# Altium PCB PCB1.PcbDoc
Units mm, origin at the board's own origin, x right, y up, seen from the top; angles counter-clockwise.
Board outline 42.53 x 54.6 mm, 2 copper layers (L1, L2), stack 1.671 mm thick; 41 components, 30 nets, 173 pads, 27 vias.
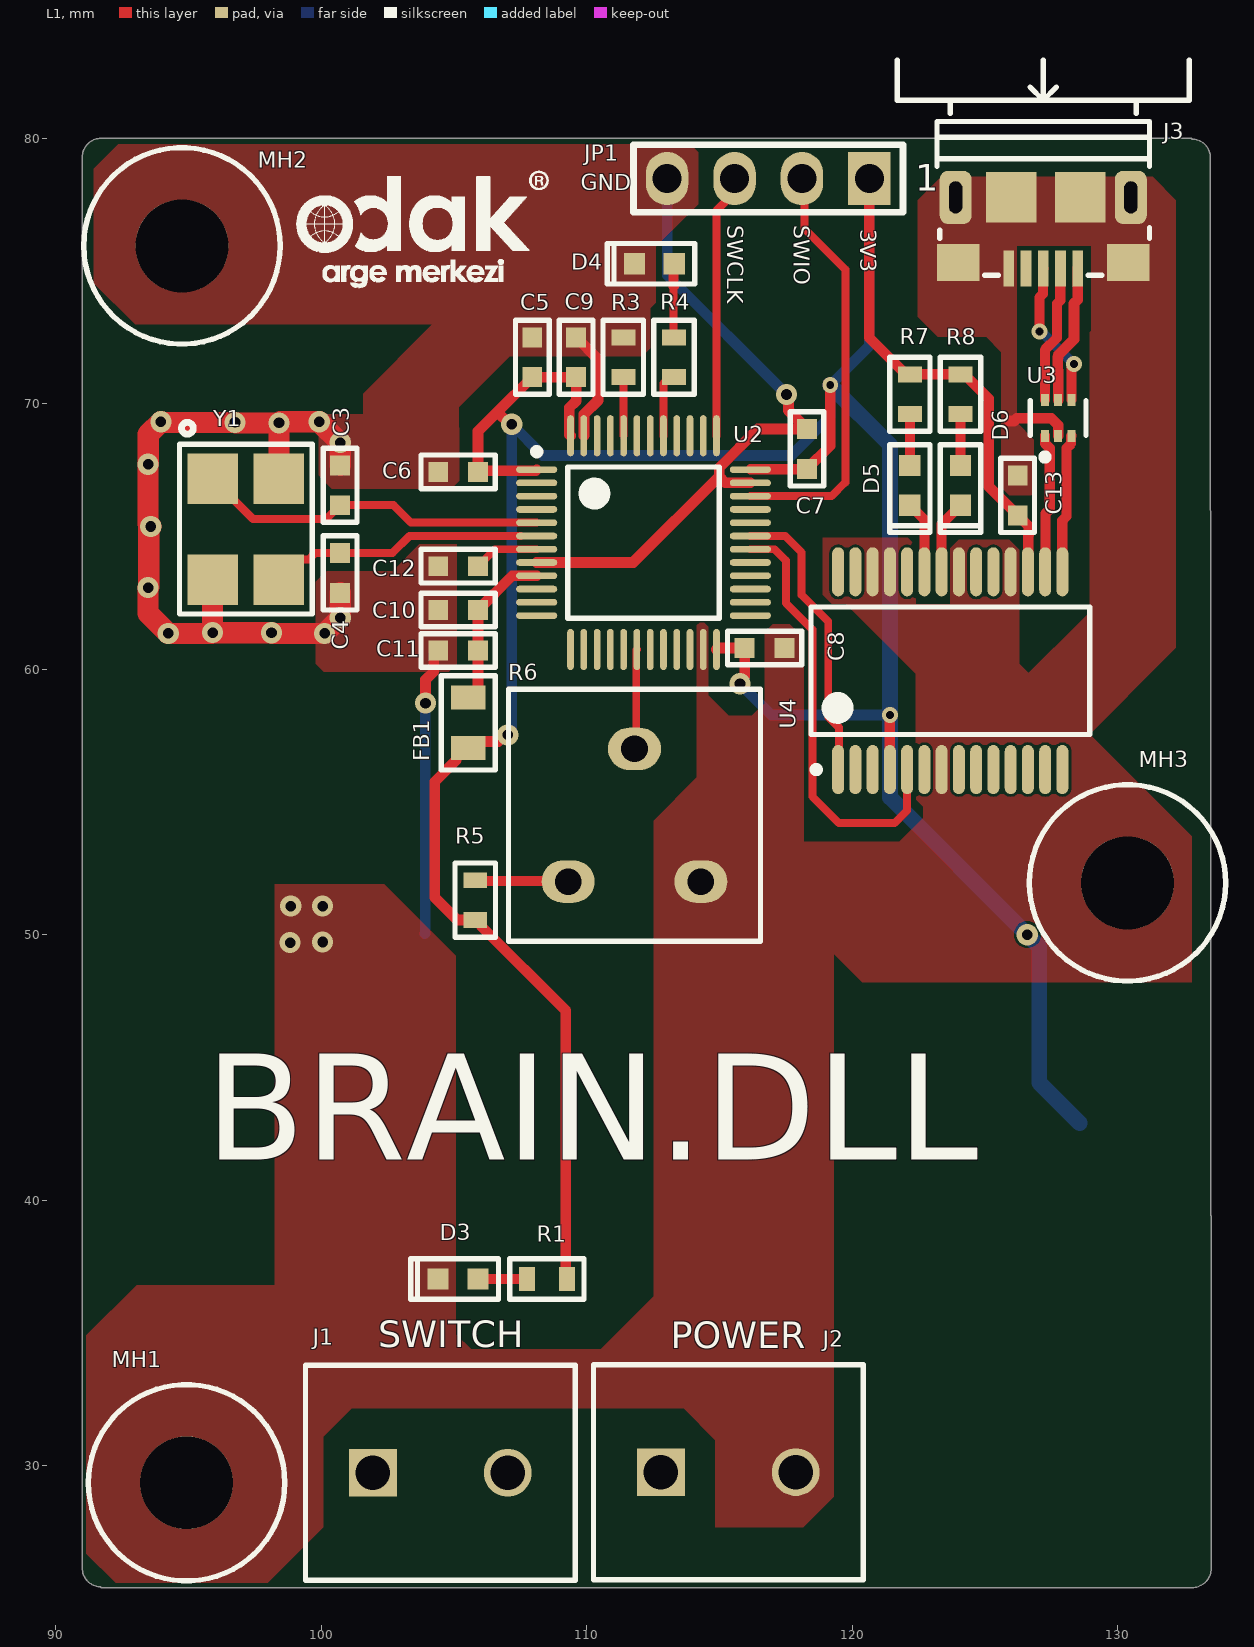
[diagram p0: L1 view]
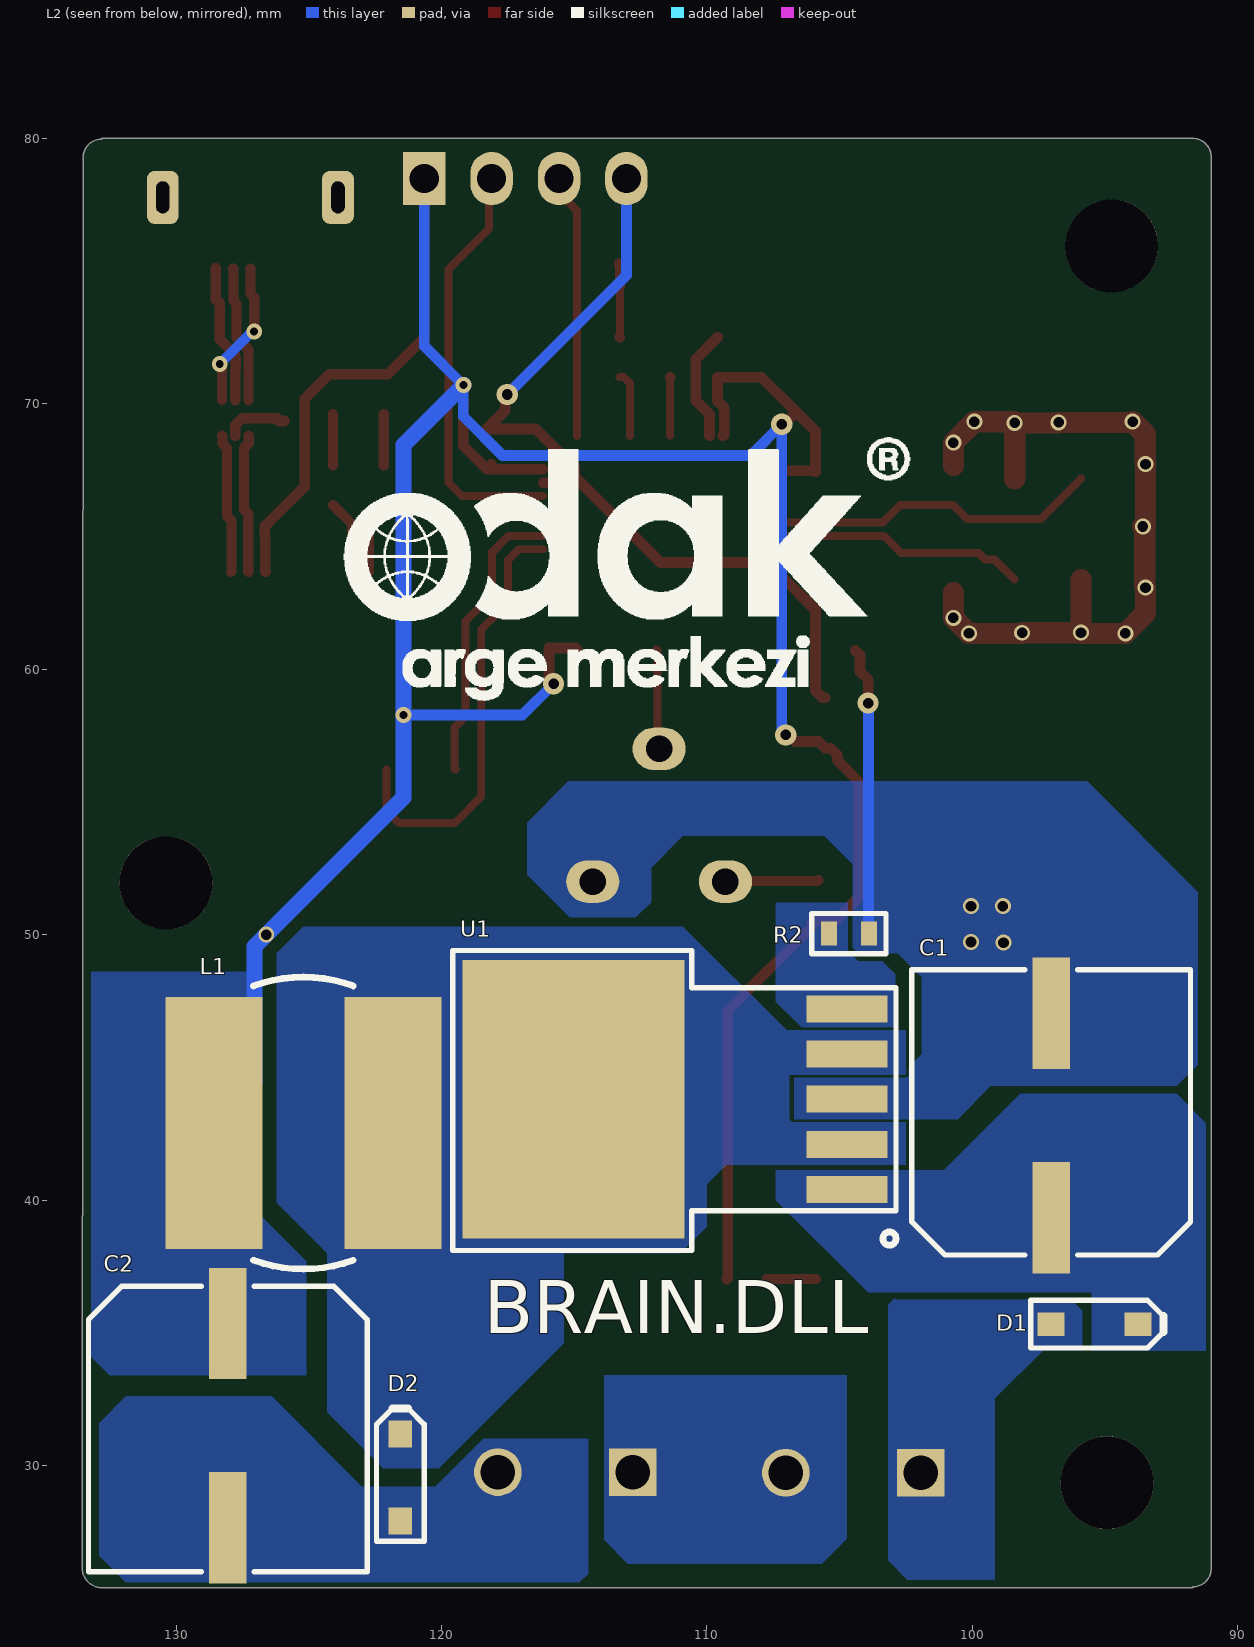
[diagram p1: L2 view, seen from below]
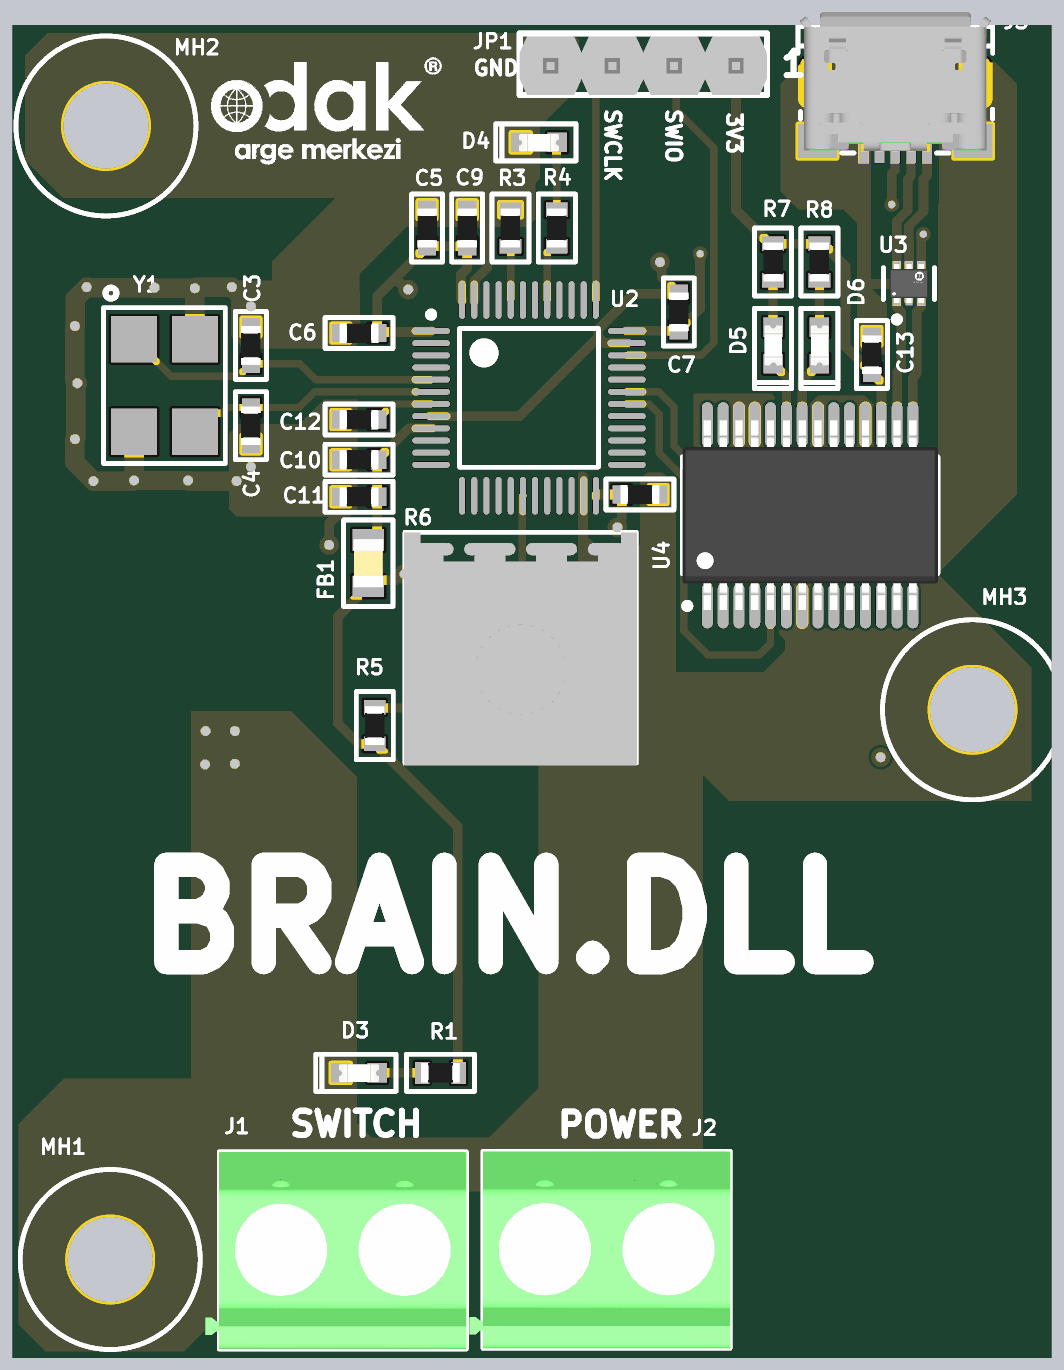
[diagram p2: 3D render of the assembled board from above, using the file's embedded part models]
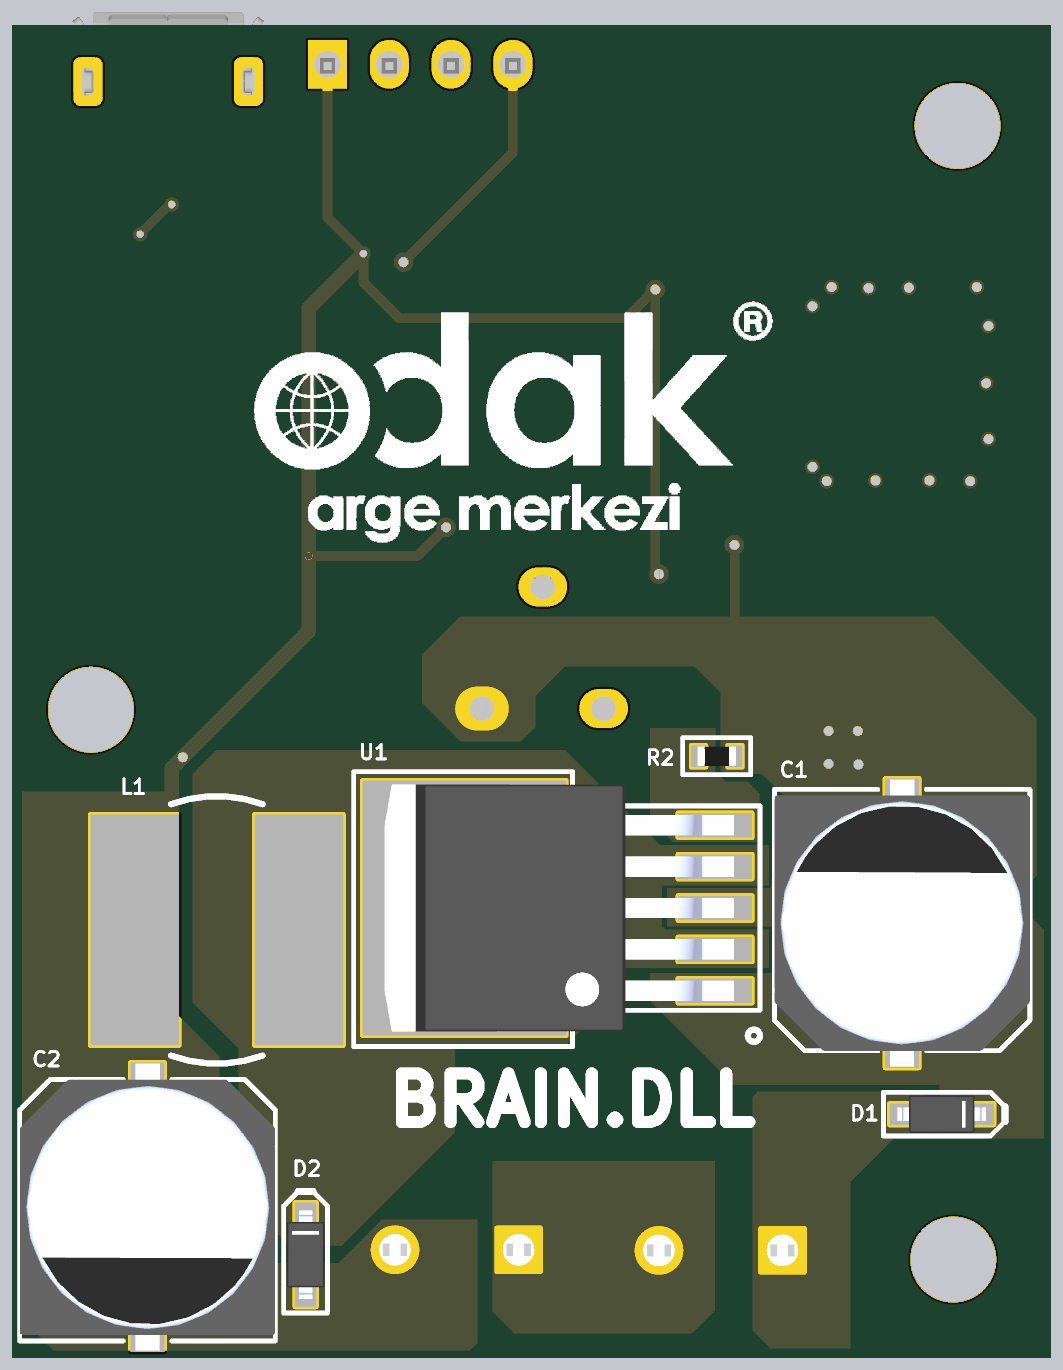
[diagram p3: 3D render of the assembled board from below, using the file's embedded part models]

## Layer stack, top to bottom
Top Solder: solder mask 0.0102, Solder Resist, Dk 3.5
L1: signal copper 0.0356
Dielectric 1: dielectric 1.6, FR-4, Dk 4.8
L2: signal copper 0.0356
Bottom Solder: solder mask 0.0102, Solder Resist, Dk 3.5

## Board outline
91,26.125 91,79.3 cw(c91.7,79.3) 91.7,80 132.8,80 132.8,79.975 cw(c132.8,79.275) 133.5,79.275 133.527,26.12 cw(c132.807,26.12) 132.807,25.4 91.7,25.4 91.7,25.425 cw(c91.7,26.125)

## Design rules (kind name [scope] priority, off if disabled: settings)
Clearance [All] p1: gap=0.1 ignorepadtopadclearanceinfootprint=FALSE
ComponentClearance [All] p1: gap=0.1 collisioncheckmode=3 verticalgap=0.1 showdistances=FALSE
DiffPairsRouting [All] p1: maxlimit=0.254 minlimit=0.254 mostfreqgap=0.254 toplayer_minwidth=0.381 toplayer_maxwidth=0.381 toplayer_prefwidth=0.381 bottomlayer_minwidth=0.381 bottomlayer_maxwidth=0.381 bottomlayer_prefwidth=0.381 maxuncoupledlength=12.7
HoleSize [All] p1: absolutevalues=TRUE maxlimit=4 minlimit=0.3 maxpercent=80.000 minpercent=20.000
HoleToHoleClearance [All] p1: gap=0.1 allowstackedmicrovias=TRUE
MinimumSolderMaskSliver [All] p1: minsoldermaskwidth=0.1
PolygonConnect [All] p1: connectstyle=Direct reliefconductorwidth=0.254 reliefentries=4 polygonreliefangle="90 Angle" airgapwidth=0.254
RoutingVias [All] p1: holewidth=0.3 width=0.6 viastyle="Through Hole" minholewidth=0.3 minwidth=0.6 maxholewidth=0.6 maxwidth=1.2
SilkToSilkClearance [All] p1: silktosilkclearance=0.1
SilkToSolderMaskClearance [IsPad] p1: minsilkscreentomaskgap=0.1 clearancetoexposedcopper=TRUE
SolderMaskExpansion [All] p1: expansion=0.1 istentingtop=FALSE
Width Power_With [InNet('3V3') or InNet('3V3A') or InNet('GND') or  InNet('R_VIN') or InNet('R_VOUT')  or InNet('VBUS') or InNet('Vin')] p1: maxlimit=4 minlimit=0.4 preferedwidth=0.4
Width [All] p2: maxlimit=4 minlimit=0.2 preferedwidth=0.2
23 further rules are at their usual default settings.

## Classes and differential pairs
differential pair class DIFF_USB: USB_D
differential pair class DIFF_ESD: USB_ESD
component class Sheet2: C13 D5 D6 J3 MH1 MH2 MH3 R7 R8 U3 U4
component class Sheet1: C1 C2 C3 C4 C5 C6 C7 C8 C9 C10 C11 C12 D1 D2 D3 D4 FB1 J1 J2 JP1 L1 R1 R2 R3 R4 R5 R6 U1 U2 Y1
differential pair USB_ESD: +USB_ESD_P -USB_ESD_N
differential pair USB_D: +USB_D_P -USB_D_N

## Components (designator, comment, footprint, x,y, rotation, side; value= is the part's Value field where it differs from the comment)
C1 "100uF" 10X10-ALCAP 97.028,43.18 r90 bottom
C2 "330uF" 10X10-ALCAP 128.05,31.5 r270 bottom
C3 "22pF" Z0603 100.711,66.929 r270 top
C4 "22pF" Z0603 100.711,63.627 r90 top
C5 "4u7" Z0603 107.95,71.755 r270 top
C6 "100n" Z0603 105.156,67.437 r0 top
C7 "100n" Z0603 118.3,68.3 r270 top
C8 "100n" Z0603 116.7,60.8 r180 top
C9 "100n" Z0603 109.601,71.755 r270 top
C10 "100n" Z0603 105.156,62.23 r0 top
C11 "1u" Z0603 105.156,60.706 r0 top
C12 "100n" Z0603 105.156,63.881 r0 top
C13 "100n" Z0603 126.238,66.548 r270 top
D1 "DIODE" SOD-123 95.4,35.325 r0 bottom
D2 "DIODE" SOD-123 121.55,29.55 r270 bottom
D3 "RED" LED-0603 105.15,37.025 r0 top
D4 "RED" LED-0603 112.55,75.275 r0 top
D5 "BLUE" LED-0603 122.174,66.929 r90 top
D6 "BLUE" LED-0603 124.079,66.929 r90 top
FB1 "FB0805" C0805 105.537,57.978 r90 top
J1 "SWITCH" PHOE-1729128-2_V 104.485,29.725 r0 top
J2 "POWER" PHOE-1729128-2_V 115.335,29.75 r0 top
J3 "TYPEB" USB-A 127.2,76.438 r180 top
JP1 "PROG_PINS" HDR-1X4-2.54mm 120.65,78.486 r270 top
L1 "470uH" 10X9-IND 125.2,42.9 r0 bottom
MH1 "MH_7.4MMC_3.2MMD" MH_7.4MMC_3.2MMD_NON_COPPER_NPLT 94.925,29.35 r0 top
MH2 "MH_7.4MMC_3.2MMD" MH_7.4MMC_3.2MMD_NON_COPPER_NPLT 94.75,75.95 r0 top
MH3 "MH_7.4MMC_3.2MMD" MH_7.4MMC_3.2MMD_NON_COPPER_NPLT 130.375,51.95 r0 top
R1 "560" R0603 108.5,37.025 r0 top
R2 "10k" R0603 104.648,50.038 r0 bottom
R3 "10k" R0603 111.379,71.755 r270 top
R4 "560" R0603 113.284,71.755 r270 top
R5 "100" R0603 105.8,51.3 r270 top
R6 "TRIMPOT" TRIM-3 111.8,54.5 r0 top
R7 "560" R0603 122.174,70.358 r90 top
R8 "560" R0603 124.079,70.358 r90 top
U1 "LM2575-ONS" D2PAK 104.72,40.396 r0 bottom
U2 "STM32F103C8T6" STM-LQFP48_L 112.141,64.77 r0 top
U3 "NUF2042XV6T1G" FP-463A-MFG 127.762,69.469 r90 top
U4 "FT232RL" FTDI-SSOP-28_M 123.698,59.944 r90 top
Y1 "8MHZ-CRY" 4-SMD 97.155,65.278 r270 top

## Footprints (in the part's own frame and the unit in brackets; to place one, negate y for a bottom-side part, rotate by r counter-clockwise, add the part's x,y. Pads: shape width x height; smd on the part's side, far side on the other; paste and mask are expansions set on the pad)
4-SMD [mm]
  rect 1.9x1.9 smd: 1(-1.9,-1.25) 2(1.9,-1.25) 3(1.9,1.25) 4(-1.9,1.25)
  silkscreen extent -4.02,-2.5 3.2,2.5, body extent -2.5,-1.6 2.5,1.6, height 1
10X9-IND [mm]
  rect 3.65x9.5 smd: 1(-3.375,0) 2(3.375,0)
  silkscreen extent -1.88,-5.5 1.88,5.5, body extent -5,-5 5,5, height 5.4
10X10-ALCAP [mm]
  rect 4.2x1.4 smd: 1(-3.85,0) 2(3.85,0)
  silkscreen extent -5.25,-5.25 5.5,5.25, body extent -5.9,-5.25 5.9,5.25, height 10.51
C0805 [mm]
  rect 0.9x1.3 smd: 1(-0.95,0) 2(0.95,0)
  silkscreen extent -1.78,-1.02 1.78,1.02, body extent -1,-0.63 1,0.63, height 0.7
D2PAK [mm]
  rect 3.05x1.016 smd: 1(0,0) 2(0,-1.702) 3(0,-3.404) 4(0,-5.106) 5(0,-6.808)
  rect 8.38x10.49 smd: 6(10.305,-3.404)
  silkscreen extent -1.85,-9 14.85,2.3, body extent -0.77,-8.48 13.58,1.68, height 4.8
FP-463A-MFG [mm]
  rect 0.45x0.3 smd paste+0 mask+0.025: 1(-0.675,0.5) 2(-0.675,0) 3(-0.675,-0.5) 4(0.675,-0.5) 5(0.675,0) 6(0.675,0.5)
  silkscreen extent -1.6,-1.05 0.65,1.05, body extent -1,-0.95 1,0.95, height 0.25
FTDI-SSOP-28_M [mm] "SOP, 28-Leads, Body 10.5x5.6mm, Pitch 0.65mm, IPC Low Density"
  oval 1.85x0.45 smd mask+0.025: 1(-3.725,4.225) 2(-3.725,3.575) 3(-3.725,2.925) 4(-3.725,2.275) 5(-3.725,1.625) 6(-3.725,0.975) 7(-3.725,0.325) 8(-3.725,-0.325) 9(-3.725,-0.975) 10(-3.725,-1.625) 11(-3.725,-2.275) 12(-3.725,-2.925) 13(-3.725,-3.575) 14(-3.725,-4.225) 15(3.725,-4.225) 16(3.725,-3.575) 17(3.725,-2.925) 18(3.725,-2.275) 19(3.725,-1.625) 20(3.725,-0.975) 21(3.725,-0.325) 22(3.725,0.325) 23(3.725,0.975) 24(3.725,1.625) 25(3.725,2.275) 26(3.725,2.925) 27(3.725,3.575) 28(3.725,4.225)
  silkscreen extent -3.85,-5.25 2.4,5.25, body extent -3.9,-5.25 3.9,5.25, height 2
HDR-1X4-2.54mm [mm]
  rect 2x1.6 hole 1.1: 1(0,0)
  oval 2x1.6 hole 1.1: 2(0,-2.54) 3(0,-5.08) 4(0,-7.62)
  silkscreen extent -1.27,-8.89 1.27,1.27, body extent -1.14,-8.89 1.27,1.27, height 8.19
LED-0603 [mm]
  rect 0.8x0.8 smd: 1(-0.75,0) 2(0.75,0)
  silkscreen extent -1.78,-0.76 1.52,0.76, body extent -0.82,-0.38 0.82,0.35, height 0.68
MH_7.4MMC_3.2MMD_NON_COPPER_NPLT [mm]
  round 3.5 hole 3.5: 1(0,0)
  silkscreen extent -3.7,-3.7 3.7,3.7
PHOE-1729128-2_V [mm] "Receptacle, 2-Leads, Body 8.1x10.16mm, Pitch 5.08mm"
  rect 1.8x1.8 hole 1.3: 1(-2.54,0)
  round 1.8 hole 1.3: 2(2.54,0)
  silkscreen extent -5.08,-4.05 5.08,4.05, body extent -5.65,-4.05 5.08,4.05, height 10.01
R0603 [mm]
  rect 0.6x0.9 smd: 1(-0.75,0) 2(0.75,0)
  silkscreen extent -1.4,-0.76 1.4,0.76, body extent -0.8,-0.4 0.8,0.4, height 0.46
SOD-123 [mm]
  rect 1.02x0.88 smd: 1(-1.635,0) 2(1.635,0)
  silkscreen extent -2.6,-0.9 2.4,0.9, body extent -1.83,-0.77 1.83,0.77, height 1.46
STM-LQFP48_L [mm] "QFP, 48-Leads, Body 7x7mm, Pitch 0.5mm, IPC High Density"
  oval 1.55x0.25 smd mask+0.025: 1(-4.025,2.75) 2(-4.025,2.25) 3(-4.025,1.75) 4(-4.025,1.25) 5(-4.025,0.75) 6(-4.025,0.25) 7(-4.025,-0.25) 8(-4.025,-0.75) 9(-4.025,-1.25) 10(-4.025,-1.75) 11(-4.025,-2.25) 12(-4.025,-2.75) 25(4.025,-2.75) 26(4.025,-2.25) 27(4.025,-1.75) 28(4.025,-1.25) 29(4.025,-0.75) 30(4.025,-0.25) 31(4.025,0.25) 32(4.025,0.75) 33(4.025,1.25) 34(4.025,1.75) 35(4.025,2.25) 36(4.025,2.75)
  oval 0.25x1.55 smd mask+0.025: 13(-2.75,-4.025) 14(-2.25,-4.025) 15(-1.75,-4.025) 16(-1.25,-4.025) 17(-0.75,-4.025) 18(-0.25,-4.025) 19(0.25,-4.025) 20(0.75,-4.025) 21(1.25,-4.025) 22(1.75,-4.025) 23(2.25,-4.025) 24(2.75,-4.025) 37(2.75,4.025) 38(2.25,4.025) 39(1.75,4.025) 40(1.25,4.025) 41(0.75,4.025) 42(0.25,4.025) 43(-0.25,4.025) 44(-0.75,4.025) 45(-1.25,4.025) 46(-1.75,4.025) 47(-2.25,4.025) 48(-2.75,4.025)
  silkscreen extent -4.15,-2.85 2.85,3.55, body extent -3.5,-3.5 3.5,3.5, height 1.6
TRIM-3 [mm]
  oval 2x1.6 hole 1: 1(-2.5,-2.5) 2(0,2.5) 3(2.5,-2.5)
  silkscreen extent -4.75,-4.75 4.75,4.75, body extent -4.79,-4.84 4.79,4.74, height 4.97
USB-A [mm]
  rect 0.4x1.35 smd mask+0.025: 1(-1.3,1.338) 2(-0.65,1.338) 3(0,1.338) 4(0.65,1.338) 5(1.3,1.338)
  rect 1.6x1.4 smd: 6(-3.2,1.112) 7(3.2,1.112)
  rrect50% 1.2x2 hole 0.5 slot 1.2 at 90 deg: 8(-3.3,-1.338) 9(3.3,-1.338)
  rect 1.9x1.9 smd: 10(-1.4,-1.338) 11(1.2,-1.338)
  silkscreen extent -5.5,-6.5 5.5,1.6, body extent -3.93,-4.2 3.93,1.58, height 2.88
Z0603 [mm]
  rect 0.75x0.75 smd: 1(-0.75,0) 2(0.75,0)
  silkscreen extent -1.4,-0.64 1.4,0.64, body extent -0.8,-0.4 0.8,0.4, height 0.46

## Part data
C1: library part 10X10-ALCAP, Manufacturer Product Number=CK1H107M10010VR, Order Link=https://ozdisan.com/pasif-komponentler/kondansatorler/aluminyum-kondansatorler/CK1H107M10010VR, Unit_Price=3,73
C2: library part 10X10-ALCAP, Manufacturer Product Number=BDS35VC330MJ10TP, Order Link=https://ozdisan.com/pasif-komponentler/kondansatorler/aluminyum-kondansatorler/BDS35VC330MJ10TP, Unit_Price=4,58
C3 C4: library part C0603, Case/Package=0603, Manufacturer Product Number=CL10C220JB8NNNC, Order Link=https://ozdisan.com/pasif-komponentler/kondansatorler/smt-smd-ve-mlcc-kondansatorler/CL10C220JB8NNNC, Unit_Price=0,14
C5: library part C0603, Case/Package=0603, Manufacturer Product Number=CL10A475KP8NNNC, Order Link=https://ozdisan.com/pasif-komponentler/kondansatorler/smt-smd-ve-mlcc-kondansatorler/CL10A475KP8NNNC, Unit_Price=0,20
C6 C7 C8 C9 C10 C12 C13: library part C0603, Case/Package=0603, Manufacturer Product Number=C0603C104J5RAC7867, Order Link=https://ozdisan.com/pasif-komponentler/kondansatorler/smt-smd-ve-mlcc-kondansatorler/C0603C104J5RAC7867, Unit_Price=0,38
C11: library part C0603, Case/Package=0603, Manufacturer Product Number=CL10B105KA8NNNC, Order Link=https://ozdisan.com/pasif-komponentler/kondansatorler/smt-smd-ve-mlcc-kondansatorler/CL10B105KA8NNNC, Unit_Price=0,14
D1 D2: library part D-SOD123, Case/Package=SOD123, Manufacturer Product Number=BYS10-45-E3/TR3, Order Link=https://ozdisan.com/guc-yari-iletkenleri/diyotlar-modul-diyotlar-ve-dogrultucular/schottky-diyotlar/BYS10-45-E3TR3, Unit_Price=4,25
D3 D4: library part L0603, Case/Package=0603, Manufacturer Product Number=HL-PST-1608S9AC, Order Link=https://ozdisan.com/led-ve-aydinlatma-cozumleri/led-komponentler/sinyal-ledler-renkli/HL-PST-1608S9AC, Unit_Price=0,33
D5 D6: library part L0603, Case/Package=0603, Manufacturer Product Number=27-21/B7C-ZR1S1N/3C, Order Link=https://ozdisan.com/led-ve-aydinlatma-cozumleri/led-komponentler/sinyal-ledler-renkli/27-21B7C-ZR1S1N3C, Unit_Price=2,28
FB1: Case/Package=0805, Manufacturer Product Number=LCB2012-101Y-N, Order Link=https://ozdisan.com/pasif-komponentler/induktorler/bead-feritler/LCB2012-101Y-N, Unit_Price=0,31
J1 J2: library part CMP-2000-05815-1, "PCB Terminal Block, 13.5 A, 400 V, 2-Pin THD, RoHS, Bulk", Case/Package=2P, Manufacturer Product Number=DG129-5.08-02P-14-00SH, Order Link=https://ozdisan.com/konnektor-ve-baglanti-elemanlari/klemensler/pcb-klemensler/DG129-5-08-02P-14-00SH, Pitch=5.08mm, Unit_Price=4,49
J3: library part USB-TYPEB, Case/Package=TYPEB
JP1: library part 1X4MALE
L1: library part 10X9-IND, Manufacturer Product Number=FPI1005-471K, Order Link=https://ozdisan.com/pasif-komponentler/induktorler/sabit-induktorler/FPI1005-471K, Unit_Price=3,99
MH1 MH2 MH3: library part MH_7.4MMNC_3.2MMD, "Mounting Hole 7.4 mm Diameter (Non Copper), 3.2 mm Drill NPTH"
R1 R4 R7 R8: library part R0603, Case/Package=0603, Manufacturer Product Number=0603SAJ0561T5E, Order Link=https://ozdisan.com/pasif-komponentler/direncler/smt-smd-ve-cip-direncler/0603SAJ0561T5E, Unit Price=0,03
R2 R3: library part R0603, Case/Package=0603, Manufacturer Product Number=CQ03SAF1002T5E, Order Link=https://ozdisan.com/pasif-komponentler/direncler/smt-smd-ve-cip-direncler/CQ03SAF1002T5E, Unit Price=0,06
R5: library part R0603, Case/Package=0603, Manufacturer Product Number=0603SAJ0101T5E, Order Link=https://ozdisan.com/pasif-komponentler/direncler/smt-smd-ve-cip-direncler/0603SAJ0101T5E, Unit Price=0,03
U1: library part LM2575, Case/Package=D2PAK, Manufacturer Product Number=LM2575D2T-3.3R4G, Order Link=https://ozdisan.com/entegre-devreler-ics/guc-entegreleri/dc-dc-voltaj-regulatorleri/LM2575D2T-3-3R4G, Unit_Price=41,51
U2: library part CMP-0237-00215-3, "ARM Cortex-M3 32-bit MCU, 64 KB Flash, 20 KB Internal RAM, 37 I/Os, 48-pin LQFP, -40 to 85 degC, Tray", Operating Frequency(F) (Processor speed) (MHz)=72, Supply Voltage(Vcc) min (V)=2, I/Os (High Current)=37, A/D Converter="2x12-bit (10 Channel)", ComponentLink1Description="Manufacturer URL", ComponentLink1URL=http://www.st.com/web/en/home.html, ComponentLink2Description=Datasheet, ComponentLink2URL=http://www.st.com/st-web-ui/static/active/en/resource/technical/document/datasheet/CD00161566.pdf, ComponentLink3Description="Package Specification", ComponentLink3URL=http://www.st.com/st-web-ui/static/active/en/resource/technical/document/datasheet/DM00058181.pdf, Core="ARM Cortex-M3", DatasheetVersion="Rev. 16", FLASH Size (Prog) (kB)=64, Mounting Technology="Surface Mount", PackageDescription="48-Pin Low Profile Quad Flat Package, 7 x 7 mm Body, 0.5 mm Pitch", PackageReference=LQFP48, PackageVersion="Rev. 6, 06/2013", Packing=Tray, PartNumber=STM32F103C8T6, Internal RAM Size (kB)=20
U3: library part CMP-1066-00027-2, "FILTER RC(PI) 22 OHM/42PF SMD", Case/Package=SOT563, Manufacturer Product Number=NUF2042XV6T1G, Order Link=https://ozdisan.com/entegre-devreler-ics/filtreler/emi-rfi-filtre-entegreleri/NUF2042XV6T1G, Unit_Price=5,87
U4: library part CMP-2000-05029-1, "IC USB FS SERIAL UART 28-SSOP", Case/Package=SSOP28, Manufacturer Product Number=FT232RL-REEL, Order Link=https://ozdisan.com/entegre-devreler-ics/interface-entegreleri/arayuz-kontrolor-entegreleri/FT232RL-REEL, Unit_Price=136,56
Y1: library part 8MHZ-CRYS-4S, Case/Package=4-SMD, Manufacturer Product Number=H130B-8.000-18-3030-EXT-, Order Link=https://ozdisan.com/pasif-komponentler/kristaller-osilatorler-ve-rezanatorler/kristaller/H130B-8-000-18-3030-EXT-, Unit_Price=7,78

## Via types
v1: diameter 0.8/0.6 (per signal layer), hole 0.4, L1 to L2, tented both sides, 18 vias
v2: diameter 0.8, hole 0.4, L1 to L2, tented both sides, 5 vias
v3: diameter 0.6, hole 0.3, L1 to L2, tented both sides, 4 vias

## Nets (pads, with @x,y where several pads share a name; then routed paths per layer and width w, separated by ;. In a path a pad name is that pad's centre, name@x,y a point inside that pad or via, vN(x,y) a via of type N, cw(c..) or ccw(c..) an arc to the next point about the centre after c; other vN are vias at no path point)
3V3: C2.1 C5.2 C6.2 C7.2 C8.2 C9.2 C13.2 FB1.1 JP1.1 L1.2 R1.2 R5.2 R7.2 R8.2 U2.1 U2.24 U2.36 U2.48 U4.4 U4.17 | length 137.6
  L1 w0.4: v2(107.025,57.525) 106.917,57.525 106.67,57.278 105.787,57.278 FB1.1 105.337,57.028 105.087,56.778 105.087,56.578 104.275,55.766 104.275,51.4 105.125,50.55 R5.2 105.95,50.55 106.05,50.45 106.05,50.3 109.208,47.142 109.208,37.067 R1.2 ; v2(107.175,69.225) 107.1,69.225 106.635,69.69 ; U2.1 108.074,67.478 105.947,67.478 C6.2 105.906,68.961 106.635,69.69 ; U2.48 109.347,68.839 109.347,69.85 109.601,70.104 C9.2 C5.2 106.635,69.69 ; U2.24 114.946,60.8 C8.2 115.95,59.733 115.775,59.558 v2(115.775,59.45) ; U2.36@116.181,67.535 C7.2@118.27,67.535 ; C7.2@118.125,67.725 118.27,67.58 C7.2@118.27,67.535 ; v3(119.175,70.7) 119.175,68.425 C7.2 118.285,67.535 C7.2@118.27,67.535 ; JP1.1 120.65,72.482 122.024,71.108 R7.2 R8.2 124.229,71.108 125.15,70.187 125.15,66.886 C13.2 126.65,65.386 126.65,65.055 126.633,65.037 126.633,63.679 U4.17 ; U4.4 121.424,56.22 v3(121.425,58.275) v3(121.425,58.275)
  L2 w0.4: v2(107.025,57.525) 107.025,57.633 107.175,57.783 v2(107.175,69.225) 108.35,68.05 117.7,68.05 119.175,69.525 v3(119.175,70.7) 120.65,72.175 JP1.1 ; v2(115.775,59.45) 116.95,58.275 v3(121.425,58.275)
  L2 w0.6: v3(119.175,70.7) 121.425,68.45 v3(121.425,58.275) 121.425,55.175 v1(126.6,50) 127.05,49.55 127.05,44.425 L1.2
3V3A: C10.2 C11.2 FB1.2 U2.9 | length 6.3
  L1 w0.4: FB1.2 105.646,58.928 105.906,59.188 C11.2 C10.2 107.196,63.52 U2.9
ANALOG: R6.2 U2.18 | length 3.8
  L1 w0.3: R6.2 111.866,57.066 111.866,60.72 U2.18
BOOT0: R3.2 U2.44 | length 2.2
  L1 w0.3: U2.44@111.385,68.801 R3.2@111.385,70.999
  L1 w0.381: R3.2 R3.2@111.385,70.999
GND: C1.2 C2.2 C3.1 C4.1 C5.1 C6.1 C7.1 C8.1 C9.1 C10.1 C11.1 C12.1 C13.1 D2.2 D3.1 D4.1 J2.2 J3.5 J3.6 J3.7 J3.8 J3.9 J3.10 J3.11 JP1.4 MH1.1 MH2.1 MH3.1 R2.1 R3.1 R6.3 U1.3 U2.8 U2.23 U2.35 U2.47 U3.2 U4.7 U4.18 U4.21 U4.25 U4.26 Y1.2 Y1.4 | length 71.2
  L1 w0.4: v2(103.925,58.725) 103.925,59.6 104.231,59.906 104.231,60.531 C11.1 ; U2.8 111.746,64.02 114.988,67.262 ; C9.1 110.425,71.681 110.425,70.125 109.9,69.6 109.9,68.804 U2.47 ; U2.35 116.161,67.025 115.225,67.025 114.988,67.262 ; v2(117.525,70.35) 117.602,70.273 117.602,69.748 C7.1 116.445,69.05 114.988,67.593 114.988,67.262 ; 125.925,69.35 126.1,69.35 126.2,69.45 127.5,69.45 127.762,69.188 U3.2
  L1 w0.8: v1(93.475,67.725) 93.475,65.475 v1(93.575,65.375) 93.5,65.3 93.5,63.1 v1(93.475,63.075) 93.475,62.108 v1(94.233,61.35) 95.875,61.35 v1(95.905,61.38) ; v1@93.483,67.725 93.483,68.85 v1(93.958,69.325) 93.983,69.3 v1(96.75,69.3) 96.77,69.28 v1(98.405,69.28) Y1.4 ; Y1.2 v1(95.905,61.38) ; v1@98.45,69.325 v1(99.925,69.325) v1(100.711,68.539) C3.1 ; C4.1 v1(100.711,61.936) v1(100.125,61.35) 98.15,61.35 v1(98.125,61.375) 95.91,61.375 v1(95.905,61.38)
  L2 w0.4: R2.1 103.911,50.052 103.911,58.712 v2(103.925,58.725) ; JP1.4 113.03,74.845 v2(117.525,70.35)
  other v1: 98.825,49.7 100.05,49.725 98.85,51.075 100.05,51.075
LED: R4.2 U2.41 | length 2.5
  L1 w0.3: U2.41 112.891,70.762 113.134,71.005 R4.2
NetD5_1: D5.1 U4.23 | length 2.7
  L1 w0.381: D5.1 122.723,65.63 U4.23
NetD5_2: D5.2 R7.1 | length 1.9
  L1 w0.381: D5.2 R7.1
NetD6_1: D6.1 U4.22 | length 2.8
  L1 w0.381: U4.22 123.373,65.473 D6.1
NetD6_2: D6.2 R8.1 | length 1.9
  L1 w0.381: D6.2 R8.1
NRST: C12.2 U2.7 | length 2.5
  L1 w0.3: C12.2 106.545,64.52 U2.7
ON/OFF: R2.2 U1.5
OSC-IN: C3.2 U2.5 Y1.1 | length 13.3
  L1 w0.3: Y1.1 97.424,65.659 100.191,65.659 C3.2 102.721,66.179 103.38,65.52 U2.5
OSC-OUT: C4.2 U2.6 Y1.3 | length 9.8
  L1 w0.3: Y1.3 99.165,64.137 99.525,64.137 99.764,64.377 C4.2 102.677,64.377 103.32,65.02 U2.6@107.531,65.02
P_LED: D3.2 R1.1 | length 1.8
  L1 w0.381: D3.2 R1.1
POWER: J1.2 J2.1
R_VIN: C1.1 D1.1 U1.1
R_VOUT: D2.1 L1.1 U1.2 U1.4 U1.6
RXD: U2.30 U4.5 | length 16.6
  L1 w0.3: U2.30 117.08,64.52 117.5,64.1 117.5,62.5 118.5,61.5 118.5,55.2 119.5,54.2 121.6,54.2 122.073,54.673 U4.5
SWCLK: JP1.3 U2.37 | length 10
  L1 w0.3: U2.37 114.891,77.277 115.57,77.956 JP1.3
SWDIO: JP1.2 U2.34 | length 15.9
  L1 w0.3: U2.34 119.22,66.52 119.742,67.042 119.742,75.058 118.2,76.6 118.2,78.396 JP1.2
T_IN: R5.1 R6.1 | length 3.5
  L1 w0.381: R5.1 105.825,52.025 109.275,52.025 R6.1
TXD: U2.31 U4.1 | length 11
  L1 w0.3: U2.31 117.48,65.02 118.1,64.4 118.1,62.8 119.1,61.8 119.1,58.2 119.5,57.8 119.5,56.246 U4.1
U_LED: D4.2 R4.1 | length 2.8
  L1 w0.3: R4.1@113.278,72.511 113.278,74.422
  L1 w0.381: R4.1@113.278,72.511 R4.1 ; 113.278,74.416 113.272,74.422 113.272,75.247 D4.2
USB_D_N: U3.1 U4.16 | length 5.3
  L1 w0.381: U3.1 127.26,68.792 127.26,68.511 127.444,68.326 127.444,66.024 127.28,65.861 127.28,63.677 U4.16
USB_D_P: U3.3 U4.15 | length 5.3
  L1 w0.381: U4.15 127.915,63.677 127.915,65.598 128.079,65.761 128.079,68.325 128.252,68.499 128.252,68.784 U3.3
USB_ESD_N: J3.2 U3.6 | length 5.2
  L1 w0.381: U3.6 127.262,72.031 127.716,72.485 127.716,73.769 127.84,73.893 127.84,75.091 J3.2
USB_ESD_P: J3.3 U3.4 | length 5.7
  L1 w0.381: v3@127.081,72.748 v3(127.054,72.721) 127.054,74.005 127.19,74.142 127.19,75.091 J3.3 ; U3.4 128.262,71.351 128.352,71.442 v3(128.352,71.501)
  L2 w0.381: v3(127.054,72.721) 127.096,72.679 127.175,72.679 v3(128.352,71.501)
VBUS: J3.1 U3.5 | length 5.3
  L1 w0.4: U3.5 127.762,71.243 127.753,71.252 127.753,71.75 127.762,71.759 127.762,71.837 128.357,72.432 128.357,73.779 128.5,73.922 J3.1
Vin: D1.2 J1.1
pads on no net: J3.4 U2.2 U2.3 U2.4 U2.10 U2.11 U2.12 U2.13 U2.14 U2.15 U2.16 U2.17 U2.19 U2.20 U2.21 U2.22 U2.25 U2.26 U2.27 U2.28 U2.29 U2.32 U2.33 U2.38 U2.39 U2.40 U2.42 U2.43 U2.45 U2.46 U4.2 U4.3 U4.6 U4.8 U4.9 U4.10 U4.11 U4.12 U4.13 U4.14 U4.19 U4.20 U4.24 U4.27 U4.28

## Polygon pours and split planes (outlines as drawn)
R_VIN on L2 "NONET_L-01_P-001" (solid, pour order 0): 91.2,34.325 95.5,34.325 95.5,36.525 103.925,36.525 107.4,40 107.4,41.125 101.075,41.125 98.2,44 92.3,44 91.2,42.9
POWER on L2 "NONET_L-01_P-001" (solid, pour order 1): 104.725,33.4 104.725,27.25 105.675,26.3 112.975,26.3 113.875,27.2 113.875,33.4
Vin on L2 "NONET_L-01_P-001" (solid, pour order 2): 99.15,25.7 99.15,32.525 97.325,34.35 95.85,34.35 95.85,35.825 96.275,36.25 102.875,36.25 102.925,36.3 103.175,36.05 103.175,35.775 103.175,26.425 102.45,25.7
R_VOUT on L2 "NONET_L-01_P-001" (solid, pour order 3): 115.4,38 115.4,34.6 120.1,29.9 122.2,29.9 124.3,32 124.3,38 126.2,39.9 126.2,49.3 125.2,50.3 110.9,50.3 107,46.4 102.5,46.4 102.5,44.725 106.9,44.725 106.9,43.05 106.775,42.925 102.5,42.925 102.5,41.325 109.275,41.325 110,40.6 110,39 111,38
GND on L2 "NONET_L-01_P-001" (solid, pour order 4): 114.475,31 118.425,31 120.225,29.2 123,29.2 126.4,32.6 131.9,32.6 132.9,31.6 132.9,26.6 131.9,25.6 114.8,25.6 114.475,25.925
3V3 on L2 "NONET_L-01_P-001" (solid, pour order 5): 125.1,33.4 132.5,33.4 133.2,34.1 133.2,48.6 126.9,48.6 126.9,39.5 125.1,37.7
ON/OFF on L2 "NONET_L-01_P-001" (solid, pour order 6): 104.7,51.2 104.7,49.4 104.3,49 103.386,49 102.9,48.514 102.9,46.5 106.425,46.5 107.4,47.475 107.4,51.2
GND on L2 "NONET_L-01_P-001" (solid, pour order 7): 104.5,52.65 105.575,53.725 110.9,53.725 112.1,52.525 112.1,51.225 112.675,50.65 115.175,50.65 116.775,52.25 116.775,54.225 115.225,55.775 95.675,55.775 91.5,51.6 91.5,45.1 92.3,44.3 99.3,44.3 100.55,43.05 106.7,43.05 106.7,44.725 102.675,44.725 101.9,45.5 101.9,48.4 102.8,49.3 104.3,49.3 104.5,49.5
GND on L1 "NONET_L-01_P-001" (solid, pour order 9): 104.188,72.987 92.988,72.987 91.425,74.55 91.425,78.85 92.35,79.775 113.9,79.775 114.2,79.475 114.2,77.525 112.6,75.925 112.6,73.8 112.4,73.6 112.4,72.1 112.1,71.8 107.1,71.8 105.175,69.875 105.175,68.725 102.425,68.725 101.575,69.575 101.575,70.375
GND on L1 "NONET_L-01_P-001" (solid, pour order 10): 105.1,64.7 103.7,64.7 102.7,63.7 100.2,63.7 99.8,63.3 99.8,60.2 100.1,59.9 104.8,59.9 105.1,60.2 105.1,61
GND on L1 "NONET_L-01_P-001" (solid, pour order 11): 99.9,69.6 99.9,67.3 100.4,66.8 104.9,66.8 105.2,67.1 105.2,69.1 104.7,69.6
GND on L1 "NONET_L-01_P-001" (solid, pour order 13): 122.675,54.825 122.675,54.4 121.775,53.5 118.1,53.5 118.1,50.475 120.375,48.2 132.8,48.2 132.8,53.7 126.3,60.2 126.3,64.5 125.925,64.875 124.025,64.875 123.7,64.55 123.7,62.45 122.4,62.45 122.4,64.65 122.1,64.95 118.9,64.95 118.9,62.8 119.225,62.475 119.75,62.475 122.4,59.825 122.4,55.1
GND on L1 "NONET_L-01_P-001" (solid, pour order 14): 128.6,57.2 126.981,57.2 126.3,57.881 126.3,59.5 128.95,62.15 128.95,72.7 129,72.75 129,75.95 126.2,75.95 126.2,69.6 126.2,69.3 126.85,68.65 126.85,66.625 126.9,66.575 126.875,66.55 125.925,66.55 125.6,66.875 125.625,66.875 125.625,71.95 125.05,72.525 123.225,72.525 122.475,73.275 122.475,77.675 123.35,78.55 131.325,78.55 132.2,77.675 132.2,60.8
GND on L1 "NONET_L-01_P-001" (solid, pour order 15): 114.25,61.75 114.15,61.65 114.15,55.925 112.525,54.3 112.525,50.6 113.3,49.825 113.525,50.05 117.825,50.05 118.175,50.4 118.175,61.175 117.65,61.7 117,61.7 116.675,61.375 116.7,61.35 116.7,58.725 116.225,58.25 115.35,58.25 114.575,59.025 114.575,61.6 114.425,61.75
GND on L1 "NONET_L-01_P-001" (solid, pour order 16): 98.25,36.8 93.05,36.8 91.15,34.9 91.15,26.675 92.25,25.575 97.975,25.575 100.075,27.675 100.075,31.075 101.15,32.15 102.9,32.15 113.65,32.15 114.85,30.95 114.85,27.675 118.15,27.675 119.3,28.825 119.3,49.275 117.975,50.6 112.525,50.6 112.525,36.375 110.525,34.375 105.65,34.375 105.075,34.95 105.075,49.2 102.375,51.9 98.25,51.9

## Silkscreen, mask and mechanical layers (free items; w line width, h text height)
Top Overlay:
  drawing of 17 lines, arcs and shapes, not listed
  text "GND" at 109.775,78.05 h0.6
  text "SWCLK" at 115.3,76.725 h0.6 r270
  text "SWIO" at 117.8,76.725 h0.6 r270
  text "3V3" at 120.3,76.575 h0.6 r270
  text "BRAIN.DLL" at 95.625,41.525 h4
  text "SWITCH" at 102.15,34.45 h1
  text "POWER" at 113.175,34.425 h1
Bottom Overlay:
  drawing of 17 lines, arcs and shapes, not listed
  text "BRAIN.DLL" at 118.4,34.975 h2
Board Shape:
  lines w0.2: 91.7,25.4 132.807,25.4 ccw(c132.807,26.12) 133.527,26.12 133.5,79.275 ccw(c132.8,79.275) 132.8,79.975 ; 91.7,25.425 cw(c91.7,26.125) 91,26.125 91,79.3 cw(c91.7,79.3) 91.7,80 132.8,80
Manufacturing Notes:
  text "ODAK ARGE INTERVIEW PROJECT" at 86.7,88.975 h2

## Dimensions
91,79.3 to 133.5,79.275 on Manufacturing Notes
91.7,25.4 to 91.7,80 on Manufacturing Notes

## Text inside footprints (layer, text, board x,y; h text height)
JP1: Top Overlay "1" at 122.379,78.029 h1